# Altium PCB inverter.PcbDoc
Units mil, origin at the board's own origin, x right, y up, seen from the top; angles counter-clockwise.
Board outline 2474 x 2658 mil, 2 copper layers (Top Layer, Bottom Layer); 43 components, 32 nets, 108 pads, 0 vias.
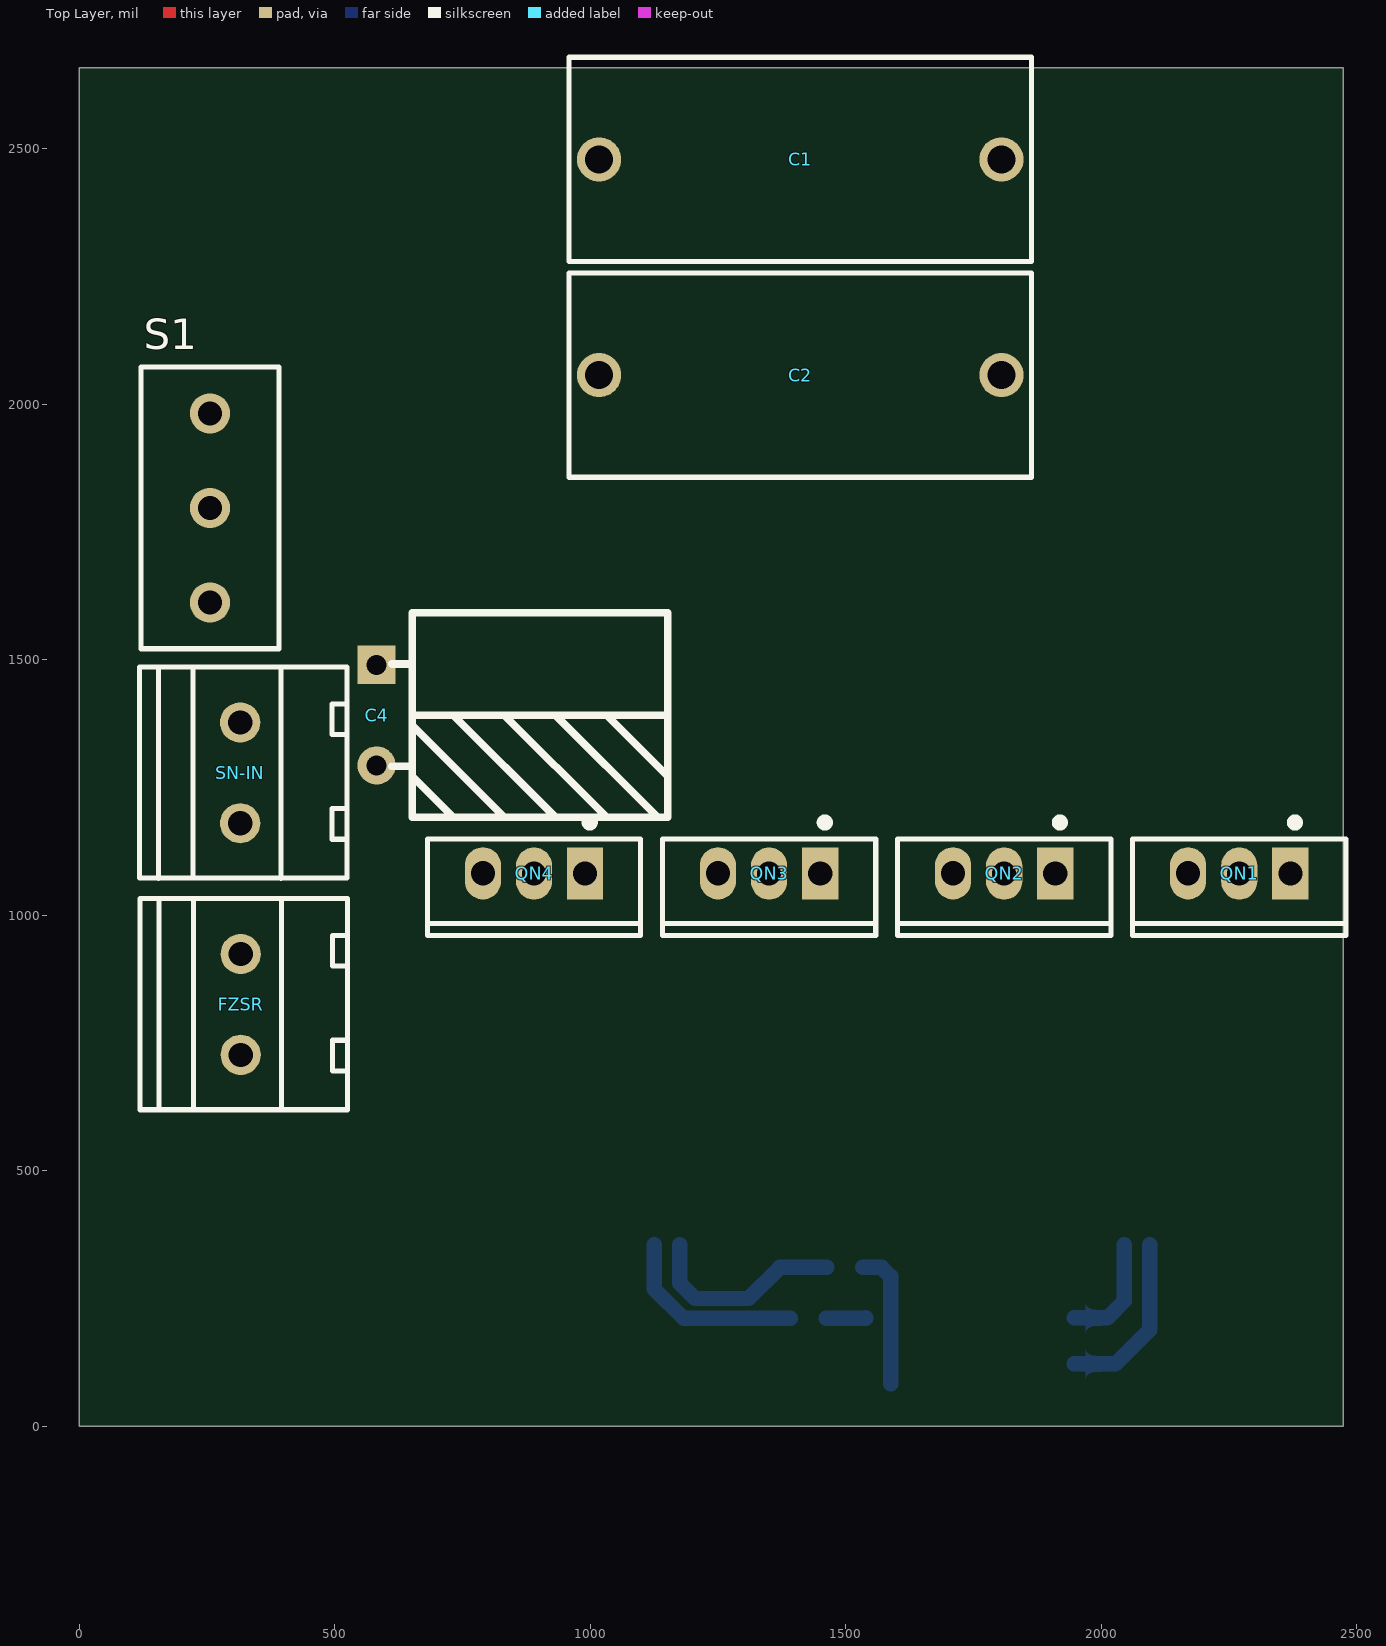
[diagram p0: Top Layer view]
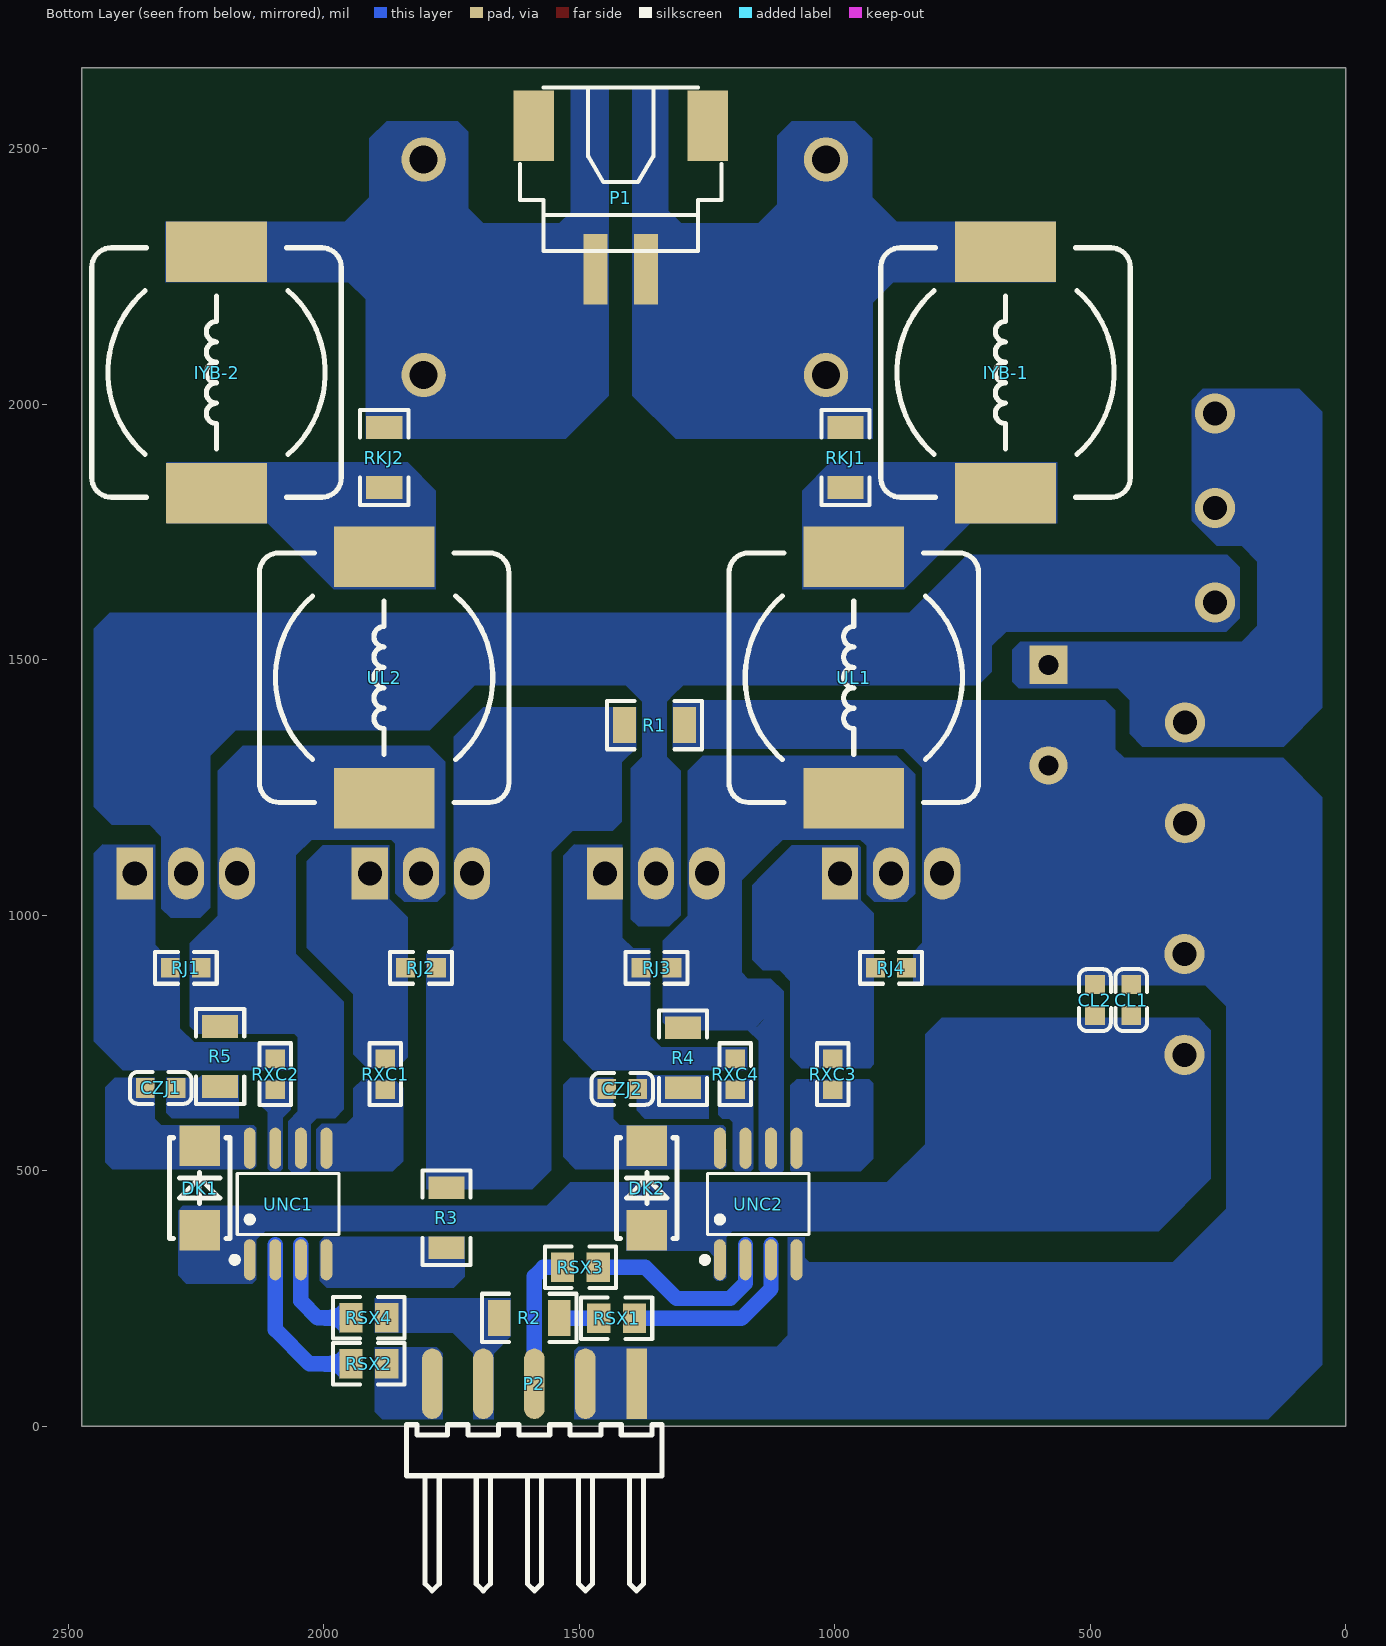
[diagram p1: Bottom Layer view, seen from below]

## Layer stack, top to bottom
Top Solder: solder mask 0.4, Solder Resist, Dk 3.5
Top Layer: signal copper 1.4
Dielectric 1: dielectric 12.6, FR-4, Dk 4.8
Bottom Layer: signal copper 1.4
Bottom Solder: solder mask 0.4, Solder Resist, Dk 3.5

## Board outline
0,0 0,2658 2474,2658 2474,0

## Design rules (kind name [scope] priority, off if disabled: settings)
Clearance [All] p1: gap=10 ignorepadtopadclearanceinfootprint=FALSE except(0: Arc-Hole Track-Hole SMDPad-Hole THPad-Hole Via-Hole Fill-Hole Poly-Hole Region-Hole Text-Hole; 5: Arc-Arc Arc-Track Arc-SMDPad Arc-Fill Arc-Poly Arc-Region Track-Track Track-SMDPad Track-Fill Track-Poly Track-Region SMDPad-Fill SMDPad-Poly SMDPad-Region)
PolygonConnect [All] p1: connectstyle=Direct reliefconductorwidth=10 reliefentries=4 polygonreliefangle="90 Angle" airgapwidth=10
RoutingVias [All] p1: holewidth=28 width=50 viastyle="Through Hole" minholewidth=28 minwidth=50 maxholewidth=28 maxwidth=50
SolderMaskExpansion [All] p1: expansion=4 istentingtop=FALSE
Width [All] p1: maxlimit=300 minlimit=10 preferedwidth=10 minimp=50.000000 maximp=50.000000 favimp=50.000000
30 further rules are at their usual default settings.

## Components (designator, comment, footprint, x,y, rotation, side; value= is the part's Value field where it differs from the comment)
C1 "2uF" CAP-TH_L23.0-W10.0-P20.00-D1.4 1411,2479 r0 top
C2 "2uF" CAP-TH_L23.0-W10.0-P20.00-D1.4 1411,2057 r0 top
C4 "220uF" "CAP 5.0*10*12.5-H" 582,1391.57 r270 top value=100uF
CL1 "104" 0603_C 420,834 r270 bottom
CL2 "104" 0603_C 491,834 r270 bottom
CZJ1 "104" 0603_C 2319.31,662 r180 bottom
CZJ2 "104" 0603_C 1416,660 r180 bottom
DK1 "Diode" SMA(DO-214AC)_S2 2243,466 r270 bottom
DK2 "Diode" SMA(DO-214AC)_S2 1368,466 r270 bottom
FZSR "C8269" C8269 249.66,820.84 r90 top
IYB-1 "220uH" CDRH127 666,2062 r90 bottom
IYB-2 "220uH" CDRH127 2210,2062 r90 bottom
P1 "PH-2Way" XH2.54-WS-2P 1419,2460 r0 bottom
P2 "Header 5" HDR2.54-WS-5P 1588,83 r0 bottom
QN1 "CSD19536KCS" TO-220-3_L10.0-W4.5-P2.54-L 2269.99,1081.8 r180 top
QN2 "CSD19536KCS" TO-220-3_L10.0-W4.5-P2.54-L 1809.99,1081.8 r180 top
QN3 "CSD19536KCS" TO-220-3_L10.0-W4.5-P2.54-L 1349.99,1081.8 r180 top
QN4 "CSD19536KCS" TO-220-3_L10.0-W4.5-P2.54-L 889.99,1081.8 r180 top
R1 "0Ω" 1206_R 1353,1372 r180 bottom
R2 "0Ω" 1206_R 1598,212 r0 bottom
R3 "0Ω" 1206_R 1760,408 r90 bottom
R4 "0Ω" 1206_R 1297,721 r90 bottom
R5 "0Ω" 1206_R 2203,723.66 r90 bottom
RJ1 "10kΩ" 0603_R 2269.99,897 r0 bottom
RJ2 "10kΩ" 0603_R 1809.99,897 r0 bottom
RJ3 "10kΩ" 0603_R 1349,897 r0 bottom
RJ4 "10kΩ" 0603_R 889.99,897 r0 bottom
RKJ1 "0Ω" 1206_R 979,1895.66 r90 bottom
RKJ2 "0Ω" 1206_R 1882,1895.66 r90 bottom
RSX1 "100Ω (1000) ±1%" 0805_R 1427.04,211 r180 bottom
RSX2 "100Ω (1000) ±1%" 0805_R 1911.96,122 r0 bottom
RSX3 "100Ω (1000) ±1%" 0805_R 1498,311 r180 bottom
RSX4 "100Ω (1000) ±1%" 0805_R 1911.96,212 r0 bottom
RXC1 "10Ω" 0603_R 1880,689 r90 bottom
RXC2 "10Ω" 0603_R 2095,689 r90 bottom
RXC3 "10Ω" 0603_R 1004,689 r90 bottom
RXC4 "10Ω" 0603_R 1195,689 r90 bottom
S1 "钮子开关" SS-12D10 256,1797 r90 top
SN-IN "C8269" C8269 248.66,1274.04 r90 top
UL1 "220uH" CDRH127 963,1465 r90 bottom
UL2 "220uH" CDRH127 1882,1465 r90 bottom
UNC1 "IR2104STRPBF" SOIC-8_L4.9-W3.9-P1.27-LS6.0-BL 2070,434.85 r180 bottom
UNC2 "IR2104STRPBF" SOIC-8_L4.9-W3.9-P1.27-LS6.0-BL 1150,434.85 r180 bottom

## Footprints (in the part's own frame and the unit in brackets; to place one, negate y for a bottom-side part, rotate by r counter-clockwise, add the part's x,y. Pads: shape width x height; smd on the part's side, far side on the other; paste and mask are expansions set on the pad)
0603_C [mm]
  rect 0.93x0.98 smd: 1(-0.77,0) 2(0.77,0)
  silkscreen extent -1.53,-0.79 1.54,0.79, body extent -0.8,-0.4 0.8,0.4, height 0.3
0603_R [mm]
  rect 0.93x0.98 smd: 1(-0.77,0) 2(0.77,0)
  silkscreen extent -1.53,-0.79 1.54,0.79, body extent -0.85,-0.4 0.85,0.4, height 0.56
0805_R [mm]
  rect 1.16x1.47 smd: 1(-0.89,0) 2(0.89,0)
  silkscreen extent -1.77,-1.04 1.77,1.03, body extent -1,-0.63 1,0.63, height 0.49
1206_R [mm]
  rect 1.13x1.8 smd: 1(-1.49,0) 2(1.49,0)
  silkscreen extent -2.36,-1.2 2.35,1.2, body extent -1.7,-0.86 1.65,0.87, height 0.85
C8269 [mm]
  round 2 hole 1.2: 1(-2.389,-1.685) 2(2.62,-1.685)
  silkscreen extent -5.13,-6.98 5.38,3.32
"CAP 5.0*10*12.5-H" [mm] "脚距5mm直径10mm高度12.5mm         淘宝ID:黄晶宝石"
  rect 1.9x1.9 hole 1: 1(-2.5,0)
  round 1.9 hole 1: 2(2.5,0)
  silkscreen extent -5.08,0.76 5.08,14.48, body extent -5,-0.3 5.01,14.41, height 10.03
CAP-TH_L23.0-W10.0-P20.00-D1.4 [mm]
  round 2.2 hole 1.4: 1(-10,0) 2(10,0)
  silkscreen extent -11.5,-5.08 11.5,5.08
CDRH127 [mm] "12*12*8mm（长宽高）"
  rect 3x5 smd: 1(-6,0) 2(6,0)
  silkscreen extent -6.2,-6.2 6.2,6.2, body extent -6,-6 6,6, height 7.8
HDR2.54-WS-5P [mm] "5P卧式贴片排针2.54"
  rect 1.02x3.5 smd: 1(-5.08,0)
  oval 1.02x3.5 smd: 2(-2.54,0) 3(0,0) 4(2.54,0) 5(5.08,0)
  silkscreen extent -6.35,2.03 6.35,10.29, body extent -6.35,-0.76 6.35,10.34, height 2.54
SMA(DO-214AC)_S2 [mm]
  rect 2x2 smd: 1(2.1,0) 2(-2.1,0)
  silkscreen extent -2.5,-1.5 2.5,1.5, body extent -2.6,-1.3 2.6,1.3, height 2.4
SOIC-8_L4.9-W3.9-P1.27-LS6.0-BL [mm]
  oval 0.588x2.045 smd: 1(-1.905,-2.773) 2(-0.635,-2.773) 3(0.635,-2.773) 4(1.905,-2.773) 5(1.905,2.773) 6(0.635,2.773) 7(-0.635,2.773) 8(-1.905,2.773)
  silkscreen extent -2.8,-2.92 2.53,1.52
SS-12D10 [mm] "脚距3mm      淘宝ID:黄晶宝石"
  round 2 hole 1.2: 1(-4.7,0) 2(0,0) 3(4.7,0)
  silkscreen extent -7,-3.43 7,3.43, body extent -7,-3.1 7,3.1, height 9.65
TO-220-3_L10.0-W4.5-P2.54-L [mm]
  rect 1.8x2.6 hole 1.2: 1(-2.54,0.005)
  oval 1.8x2.6 hole 1.2: 2(0,0.005) 3(2.54,-0.005)
  silkscreen extent -5.3,-2.73 5.3,3.09
XH2.54-WS-2P [mm] "长：10mm，宽：8mm，高：6.1mm   淘宝ID:黄晶宝石   店铺网址:https://shop463601444.taobao.com"
  rect 2x3.5 smd: 0(-4.327,-2.15) 0(4.327,-2.15)
  rect 1.2x3.5 smd: 1(-1.25,4.981) 2(1.25,4.981)
  silkscreen extent -5,-4.06 5,4.06, body extent -5,-4 5,6.42, height 6.05

## Part data
C1 C2: library part 2uF-CBB, "CBB，2uF电容", BOM_JLCPCB Part Class="Extended Part", BOM_Manufacturer=SRD, BOM_Manufacturer Part=MPP205J4241119LC, BOM_Supplier=LCSC, BOM_Supplier Part=C93266, nameAlias=Capacitance, spicePre=C, spiceSymbolName=MPP205J4241119LC
C4: library part TH_Cap, "插件电容", Equivalent Series Resistance(ESR)=-, JLCPCB Part Class="Extended Part", LCSC Part Name="100uF ±20% 16V", Lifetime @ Temp=2000hrs@105℃, Manufacturer="MAN YUE(万裕科技)", Manufacturer Part=ULR107M1CE08TUX0CR, Operating Temperature=-55℃~+105℃, Rated Voltage=16V, Tolerance=±20%, Add into BOM=yes, Convert to PCB=yes, Datasheet=https://atta.szlcsc.com/upload/public/pdf/source/20211118/585B9CEDE9E08D4A86043C401C7B1F80.pdf, Device=ULR107M1CE08TUX0CR, L=8mm, Lead Spacing=2.5mm, Name=100uF, Ripple Current=-, Supplier=LCSC, Supplier Footprint=径向引线,6.3x8mm, Supplier Part=C2923568, Symbol=ULR107M1CE08TUX0CR, Type=聚合物, φD=6.3mm
CL1 CL2 CZJ1 CZJ2: library part SMT_Cap, "贴片电容", Package=0805, SuppliersPartNumber=C28260, ComponentLink1Description=供应商链接, ComponentLink1URL=http://www.szlcsc.com/product/details_29010.html, Supplier=LC
DK1 DK2: "通用二极管", Package=SOD-123, SuppliersPartNumber=C8598, ComponentLink1Description=供应商链接, ComponentLink1URL=http://www.szlcsc.com/product/details_9093.html, Supplier=LC
IYB-1 IYB-2 UL1 UL2: library part SMT_Iud_Power, "功率电感", Package=0603, SuppliersPartNumber=C29258, ComponentLink1Description=供应商链接, ComponentLink1URL=http://www.szlcsc.com/product/details_30010.html, Supplier=LC
P2: "排针"
QN1 QN2 QN3 QN4: "实验室现有NMOS", BOM_JLCPCB Part Class="Extended Part", BOM_Manufacturer="Texas Instruments", BOM_Manufacturer Part=CSD19536KCS, BOM_Supplier=LCSC, BOM_Supplier Part=C206030, Contributor=LCSC, spicePre=Q, spiceSymbolName=CSD19536KCS
R1 R2 R3 R4 R5 RJ1 RJ2 RJ3 RJ4 RKJ1 RKJ2 RXC1 RXC2 RXC3 RXC4: library part SMT_Res, "贴片电阻", Package=0603, SuppliersPartNumber=C23253, ComponentLink1Description=供应商链接, ComponentLink1URL=http://www.szlcsc.com/product/details_23980.html, Supplier=LC
RSX1 RSX2 RSX3 RSX4: library part "0805 100Ω (1000) 1%", "贴片电阻", Package=0805, SuppliersPartNumber=C17408, ComponentLink1Description=供应商链接, ComponentLink1URL=http://www.szlcsc.com/product/details_18096.html, Supplier=LC
S1: "大功率开关"
UNC1 UNC2: "贴片IR2104封装", BOM_JLCPCB Part Class="Extended Part", BOM_Manufacturer=IR, BOM_Manufacturer Part=IR2104STRPBF, BOM_Supplier=LCSC, BOM_Supplier Part=C2960, spicePre=X, spiceSymbolName=IR2104STRPBF

## Nets (pads, with @x,y where several pads share a name; then routed paths per layer and width w, separated by ;. In a path a pad name is that pad's centre, name@x,y a point inside that pad or via, vN(x,y) a via of type N, cw(c..) or ccw(c..) an arc to the next point about the centre after c; other vN are vias at no path point)
+12: CL1.2 CL2.2 DK1.1 DK2.1 FZSR.1 UNC1.1 UNC2.1
DGND: QN2.3 R1.1 R3.2 RJ2.1
GND: C4.2 CL1.1 CL2.1 FZSR.2 P2.1 P2.2 QN4.3 R1.2 RJ4.1 SN-IN.1 UNC2.4
NetCZJ1_1: CZJ1.1 DK1.2 UNC1.8
NetCZJ1_2: CZJ1.2 R5.1
NetCZJ2_1: CZJ2.1 DK2.2 UNC2.8
NetCZJ2_2: CZJ2.2 R4.1
NetIYB-1_1: IYB-1.1 RKJ1.1 UL1.2
NetIYB-2_1: IYB-2.1 RKJ2.1 UL2.2
NetP2_3: P2.3 RSX3.1 | length 272.7
  Bottom Layer w30: RSX3.1 1570.43,311 1588,293.43 P2.3
NetP2_5: P2.5 RSX2.1
NetQN1_1: QN1.1 RJ1.2 RXC2.2
NetQN1_3: QN1.3 QN2.2 R5.2 RJ1.1 UL2.1 UNC1.6
NetQN2_1: QN2.1 RJ2.2 RXC1.2
NetQN3_1: QN3.1 RJ3.2 RXC4.2
NetQN3_3: QN3.3 QN4.2 R4.2 RJ3.1 UL1.1 UNC2.6
NetQN4_1: QN4.1 RJ4.2 RXC3.2
NetR2_1: R2.1 RSX1.1 | length 77.7
  Bottom Layer w30: RSX1.1 1462.58,211.5 1538.84,211.5 R2.1
NetR3_1: R3.1 UNC1.4
NetRSX2_2: RSX2.2 UNC1.2 | length 341.8
  Bottom Layer w30: RSX2.2 2028,122 2095,189 UNC1.2 UNC1.2@2095,355
NetRSX3_2: RSX3.2 UNC2.2 | length 400.7
  Bottom Layer w30: UNC2.2@1175,355 UNC2.2 1175,280 1205,250 1310,250 1371,311 RSX3.2
NetRSX4_2: RSX4.2 UNC1.3 | length 221.7
  Bottom Layer w30: RSX4.2 2012,212 2045,245 UNC1.3 UNC1.3@2045,355
NetRXC1_1: RXC1.1 UNC1.5
NetRXC2_1: RXC2.1 UNC1.7
NetRXC3_1: RXC3.1 UNC2.5
NetRXC4_1: RXC4.1 UNC2.7
NOUT1: C1.1 C2.1 IYB-1.2 P1.1 RKJ1.2
NOUT2: C1.2 C2.2 IYB-2.2 P1.2 RKJ2.2
SD: RSX1.2 UNC2.3 | length 377
  Bottom Layer w30: UNC2.3@1125,355 UNC2.3 1125,269 1183,211 RSX1.2
SD2: P2.4 R2.2 RSX4.1
VCC: QN1.2 QN3.2 S1.1
VIN: C4.1 S1.2 S1.3 SN-IN.2
pads on no net: P1.0

## Polygon pours and split planes (outlines as drawn)
NetRXC3_1 on Bottom Layer "NETRXC3_1_L02_P000" (solid, pour order 0): 1075,679 1087,667 1087,501 1085,499 949,499 925,523 925,671 933,679
NetQN2_1 on Bottom Layer "NETQN2_1_L02_P010" (solid, pour order 10): 1915,701 1942,728 1942,845 2033,936 2033,1106 2002,1137 1872,1137 1872,1032 1836,996 1836,722 1857,701
NetQN1_3 on Bottom Layer "Bottom Layer-NetQN1_3" (solid, pour order 57): 1961,620 1978,603 2014,603 2026,591 2026,501 2031,496 2062,496 2071,505 2071,596 2051,616 2051,761 2058,768 2072,768 2247,768 2262,783 2262,918 2262.24,918.24 2262.24,944.95 2208,999.18 2208,1283 2159,1332 1794,1332 1762,1300 1762,1042 1778,1026 1843,1026 1860,1043 1860,1140 1868,1148 2024,1148 2055,1117 2055,925 1961,831
NetRXC1_1 on Bottom Layer "NETRXC1_1_L02_P007" (solid, pour order 7): 1924,679 1942,661 1942,606 1956,592 2004,592 2015,581 2015,505 2009,499 1865,499 1845,519 1845,662 1862,679
NetQN3_3 on Bottom Layer "Bottom Layer-NetQN3_3" (solid, pour order 55): 1128,1122 1182,1068 1182,888 1170,876 1125,876 1100,851 1100,501 1106,495 1141.66,495 1149,502.34 1149,754 1170,775 1193,775 1321,775 1337,791 1337,950.18 1288,999.18 1288,1283 1259,1312 879,1312 843,1276 843,1042 859,1026 923,1026 938,1041 938,1136 950,1148 1102,1148
NetP2_5 on Bottom Layer "NETP2_5_L02_P053" (solid, pour order 53): 1900,155 1779,155 1767,143 1767,14 1886,14 1900,28
GND on Bottom Layer "Bottom Layer-GND" (solid, pour order 37): 1510,14 1510,148 1502,156 1114,156 1092.19,178 1092.19,370 1059,370 1059,330 1050,321 339,321 234,426 234,822 275,863 847,863 847,928 829,946 829,1289 866,1326 1317,1326 1317,1421 471,1421 451,1401 451,1325 434,1308 123,1308 46,1231 46,120 152,14
SD2 on Bottom Layer "SD2_L02_P052" (solid, pour order 52): 1634,176 1668,142 1668,14 1708,14 1708,143 1748,183 1900,183 1900,250 1634,250
VCC on Bottom Layer "Bottom Layer-VCC" (solid, pour order 25): 2284,1592 2419,1592 2450,1561 2450,1212 2415,1177 2341,1177 2318,1154 2318,1013 2300,995 2242,995 2222,1015 2222,1312 2172,1362 1793,1362 1705,1450 1409,1450 1377,1418 1377,1310 1399,1288 1399,992 1385,978 1323,978 1302,999 1302,1283 1329,1310 1329,1418 1297,1450 719,1450 693,1476 693,1527 665,1555 234,1555 208,1581 208,1681 232,1705 741,1705 854,1592
NOUT2 on Bottom Layer "Bottom Layer-NOUT1" (solid, pour order 51): 1442,2616 1517,2616 1517,2376 1539,2354 1688,2354 1717,2383 1717,2533 1738,2554 1877,2554 1911,2520 1911,2405 1959,2357 2310,2357 2310,2239 1952,2239 1918,2205 1918,1932 1527,1932 1442,2017
NOUT1 on Bottom Layer "Bottom Layer-NOUT1" (solid, pour order 31): 1301,2354 1326,2379 1326,2616 1396,2616 1396,2017 1311,1932 926,1932 926,2199 886,2239 567,2239 568,2240 568,2357 879,2357 927,2405 927,2520 961,2554 1084,2554 1113,2525 1113,2391 1150,2354
NetIYB-2_1 on Bottom Layer "NETIYB-2_1_L02_P050" (solid, pour order 50): 2307,1767 2110,1767 1981,1638 1781,1638 1781,1739.63 1780.94,1739.69 1780.94,1830.94 1836,1886 2307,1886
NetIYB-1_1 on Bottom Layer "NETIYB-1_1_L02_P049" (solid, pour order 49): 565,1767 735,1767 864,1638 1064,1638 1064,1739.63 1064.06,1739.69 1064.06,1830.94 1009,1886 565,1886
VIN on Bottom Layer "VIN_L02_P048" (solid, pour order 48): 398,1330 423,1355 423,1421 446,1444 640,1444 653,1457 653,1519 637,1535 204,1535 173,1566 173,1692 204,1723 253,1723 302,1772 302,2008 280,2030 91,2030 46,1985 46,1406 122,1330
NetCZJ1_1 on Bottom Layer "NETCZJ1_1_L02_P047" (solid, pour order 47): 2409,682 2428,663 2428,517 2414,503 2138.31,503 2132.31,509 2132.31,515 2132.4,571.32 2132.4,584.08 2137.31,589 2318.31,589 2331.31,602 2331.31,682
NetCZJ1_2 on Bottom Layer "NETCZJ1_2_L02_P046" (solid, pour order 46): 2308,613 2298,603 2167,603 2167,688 2238,688 2244,682 2308,682
NetCZJ2_2 on Bottom Layer "NETCZJ2_2_L02_P045" (solid, pour order 45): 1388,618 1372,602 1247,602 1247,688 1318,688 1388,688
NetCZJ2_1 on Bottom Layer "NETCZJ2_1_L02_P044" (solid, pour order 44): 1518,682 1532,668 1532,641 1532,527 1508,503 1219,503 1213,509 1213,515 1213.08,571.32 1213.08,584.08 1218,589 1421,589 1434,602 1434,682
NetR3_1 on Bottom Layer "NETR3_1_L02_P042" (solid, pour order 42): 1724,293 1746,271 1994,271 2008,285 2008,362 1999,371 1724,371
DGND on Bottom Layer "Bottom Layer-DGND" (solid, pour order 40): 1417,1299 1417,1183 1435,1165 1513,1165 1555,1123 1555,501 1592,464 1800,464 1800,924 1794,930 1756,930 1746,940 1746,1349 1688,1407 1389,1407 1389,1327
+12 on Bottom Layer "+12_L02_P034" (solid, pour order 34): 791,799 823,767 823,551.35 898.61,477 1518,477 1564,431 2276,431 2285,422 2285,295 2269,279 2140,279 2132,287 2132,365 2115,382 1408,382 1408,343 1247,343 1237,333 1237,291 1231,285 1219,285 1213,291 1213,370 1201,382 366,382 264,484 264,775 288,799
NetQN1_1 on Bottom Layer "NETQN1_1_L02_P011" (solid, pour order 11): 2330,1137.97 2330,942 2316,928 2282,928 2282,779 2254,751 2066,751 2066,697 2394,697 2450,753 2450,1121 2432.51,1138.49
NetRXC2_1 on Bottom Layer "NETRXC2_1_L02_P008" (solid, pour order 8): 2110,504 2105,499 2085,499 2080,504 2080,604 2065,619 2065,679 2125,679 2125,629 2110,614
NetQN3_1 on Bottom Layer "NETQN3_1_L02_P004" (solid, pour order 4): 1416,1138 1416,956 1395,935 1361,935 1361,763 1340,742 1171,742 1171,697 1474,697 1532,755 1532,1116 1509.52,1138.48
NetQN4_1 on Bottom Layer "NETQN4_1_L02_P003" (solid, pour order 3): 1143,1078 1162,1059 1162,913 1141,892 1108,892 1087,871 1087,722 1066,701 931,701 924,708 924,1004 949,1029 949,1137 1084,1137
NetRXC4_1 on Bottom Layer "NETRXC4_1_L02_P001" (solid, pour order 1): 1200,595 1207,602 1220,602 1228,610 1228,679 1160,679 1160,504 1165,499 1195,499 1200,504

## Other copper
Bottom Layer:
  pour cut-out: 1140,795 1153,782 1140,795

## Silkscreen, mask and mechanical layers (free items; w line width, h text height)
Mechanical 1:
  the board outline again, w15